# EAGLE board Stepper_driver_daughter_board_+_laser_v5 (EAGLE 9.7.0)
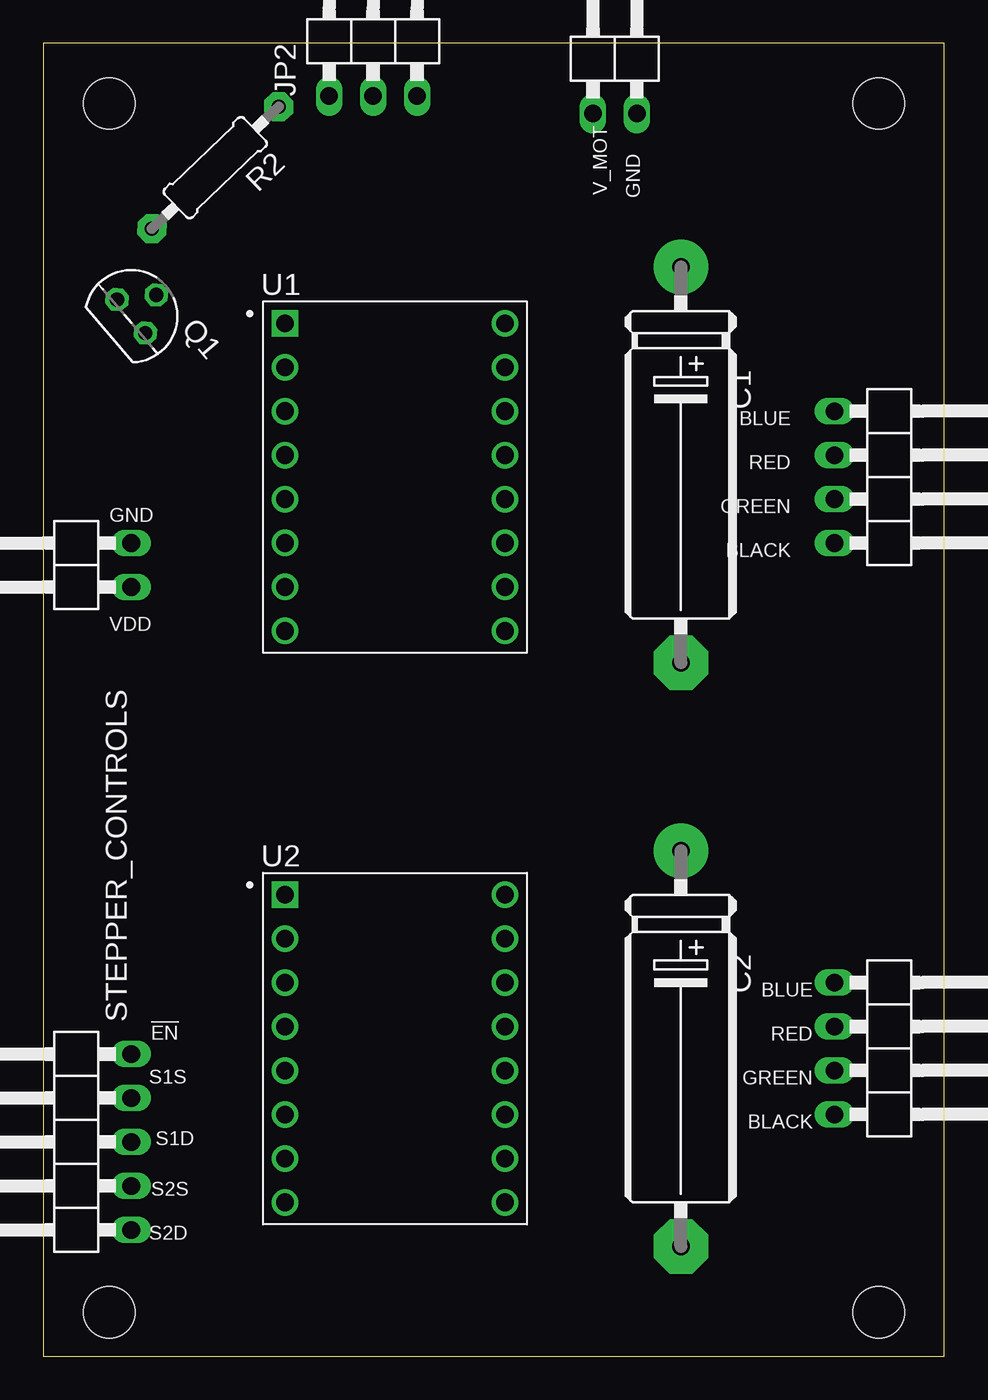
[diagram p0: board, top side]
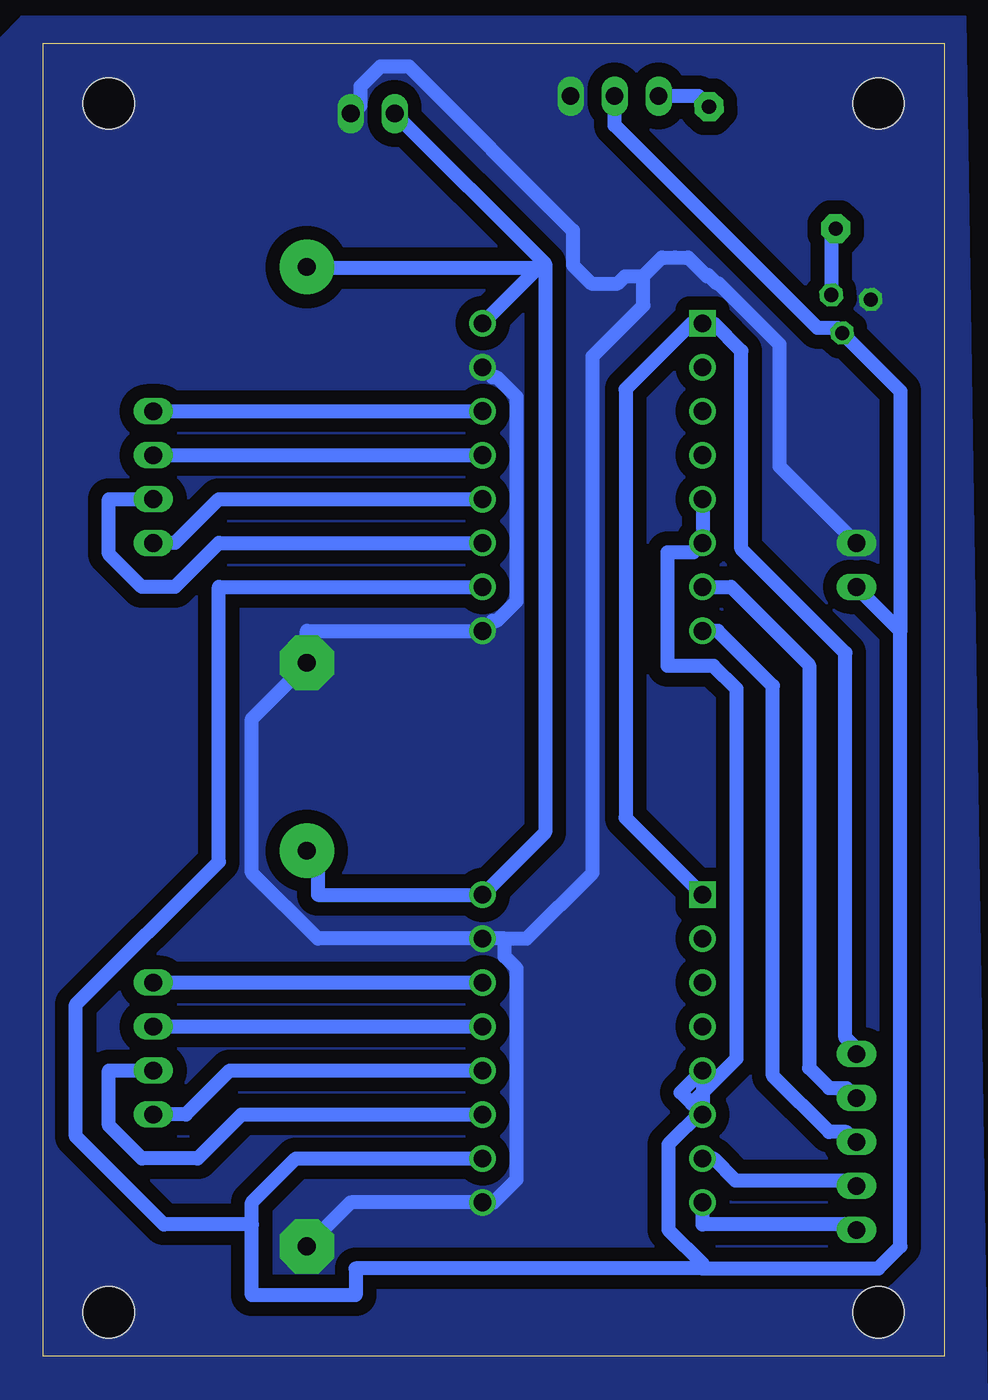
[diagram p1: board, bottom side, seen from below]

Size 52.05 x 75.87 mm. Coordinates in mm from the lower left corner, seen from the top.
Outline: 0,0 52.05,0 52.05,75.87 0,75.87 0,0
Copper layers (1*16): Top 0.035mm / dielectric 1.5mm / Bottom 0.035mm
Design rules "OthermillDRC_1_32_v2 *": minimum track width 32mil, minimum drill 0.8mm, track to track 0.794003125mm, track to pad 0.794003125mm, pad to pad 0.794003125mm, via to via 0.794003125mm, smd to smd 0mil, copper to edge 0mil, drill to drill 1mil, minimum pad ring 10mil, minimum via ring 10mil, stop-mask expansion 1mil, vias tented up to drill 30mil, thermal gap 10mil
Holes 2.95 mm at 3.81,2.54 48.26,2.54 48.26,72.39 3.81,72.39

## Footprints (pad centres in the part's own frame; a part is rotated, then mirrored left to right if it is on the bottom)
E22-6 = drill 1.016 pad 3.15: + -11.43,0 | drill 1.016 pad 3.15 octagon: - 11.43,0
1X03/90 = drill 1.016 long: 1 -2.54,-3.81; 2 0,-3.81; 3 2.54,-3.81
TO92 = drill 0.813 octagon: 1 -1.27,0; 2 0,1.905; 3 1.27,0
0207/10 = drill 0.813 pad 1.676 octagon: 1 -5.08,0; 2 5.08,0
1X04/90 = drill 1.016 long: 1 -3.81,-3.81; 2 -1.27,-3.81; 3 1.27,-3.81; 4 3.81,-3.81
1X05/90 = drill 1.016 long: 1 -5.08,-3.81; 2 -2.54,-3.81; 3 0,-3.81; 4 2.54,-3.81; 5 5.08,-3.81
MODULE_A4988_STEPPER_MOTOR_DRIVER_CARRIER = drill 1.02 square: 1 -6.35,8.89 | drill 1.02: 2 -6.35,6.35; 3 -6.35,3.81; 4 -6.35,1.27; 5 -6.35,-1.27; 6 -6.35,-3.81; 7 -6.35,-6.35; 8 -6.35,-8.89; 9 6.35,-8.89; 10 6.35,-6.35; 11 6.35,-3.81; 12 6.35,-1.27; 13 6.35,1.27; 14 6.35,3.81; 15 6.35,6.35; 16 6.35,8.89
1X02/90 = drill 1.016 long: 1 -1.27,-3.81; 2 1.27,-3.81

## Placement (x,y rotation side)
C1  100u  [E22-6]  36.83,51.51 270 top
C2  100u  [E22-6]  36.83,17.78 270 top
JP2  PINHD-1X3/90  [1X03/90]  19.05,76.63 0 top
Q1  NPN  [TO92]  5.08,60.1 310.3 top
R2  2.4k  [0207/10]  9.94,68.68 223.9 top
STEPPER1_OUT  PINHD-1X4/90  [1X04/90]  49.51,50.8 270 top
STEPPER2_OUT  PINHD-1X4/90  [1X04/90]  49.51,17.78 270 top
STEPPER_CONTROLS  PINHD-1X5/90  [1X05/90]  1.27,12.38 90 top
U1  A4988_STEPPER_MOTOR_DRIVER_CARRIER  [MODULE_A4988_STEPPER_MOTOR_DRIVER_CARRIER]  20.32,50.8 0 top
U2  A4988_STEPPER_MOTOR_DRIVER_CARRIER  [MODULE_A4988_STEPPER_MOTOR_DRIVER_CARRIER]  20.32,17.78 0 top
V_DD  PINHD-1X2/90  [1X02/90]  1.27,45.72 90 top
V_MOT  PINHD-1X2/90  [1X02/90]  33.02,75.62 0 top

## Library data of the parts
C1 C2 R2 = adafruit
JP2 = Connector; CATEGORY: Headers; DESCRIPTION: Header, Right Angle, 3 Position; MANUFACTURER: Generic; MPN: Generic; OPERATING_TEMPERATURE: Generic; PART_STATUS: Active; PITCH: 0.100" (2.54mm); ROHS_COMPLIANCE: Generic; SERIES: Generic; SUB-CATEGORY: Headers, Male Pins; TYPE: Board to Board or Cable, Unshrouded, Through Hole, Right Angle
Q1 = Transistor; CATEGORY: Transistor; SUB-CATEGORY: BJT; TYPE: NPN
STEPPER1_OUT STEPPER2_OUT = Connector; CATEGORY: Headers; DESCRIPTION: Header, Right Angle, 4 Position; MANUFACTURER: Generic; MPN: Generic; OPERATING_TEMPERATURE: Generic; PART_STATUS: Active; PITCH: 0.100" (2.54mm); ROHS_COMPLIANCE: Generic; SERIES: Generic; SUB-CATEGORY: Headers, Male Pins; TYPE: Board to Board or Cable, Unshrouded, Through Hole, Right Angle
STEPPER_CONTROLS = Connector; CATEGORY: Headers; DESCRIPTION: Header, Right Angle, 5 Position; MANUFACTURER: Generic; MPN: Generic; OPERATING_TEMPERATURE: Generic; PART_STATUS: Active; PITCH: 0.100" (2.54mm); ROHS_COMPLIANCE: Generic; SERIES: Generic; SUB-CATEGORY: Headers, Male Pins; TYPE: Board to Board or Cable, Unshrouded, Through Hole, Right Angle
U1 U2 = A4988_STEPPER_MOTOR_DRIVER_CARRIER; AVAILABILITY: Not in stock; CHECK_PRICES: https://www.snapeda.com/parts/A4988%20STEPPER%20MOTOR%20DRIVER%20CARRIER/Pololu/view-part/?ref=eda; DESCRIPTION: Stepper Motor Driver; MF: Pololu; MP: A4988 STEPPER MOTOR DRIVER CARRIER; PACKAGE: None; PRICE: None; SNAPEDA_LINK: https://www.snapeda.com/parts/A4988%20STEPPER%20MOTOR%20DRIVER%20CARRIER/Pololu/view-part/?ref=snap
V_DD V_MOT = Connector; CATEGORY: Headers; DESCRIPTION: Header, Right Angle, 2 Position; MANUFACTURER: Generic; MPN: Generic; OPERATING_TEMPERATURE: Generic; PART_STATUS: Active; PITCH: 0.100" (2.54mm); ROHS_COMPLIANCE: Generic; SERIES: Generic; SUB-CATEGORY: Headers, Male Pins; TYPE: Board to Board or Cable, Unshrouded, Through Hole, Right Angle

## Nets
!ENABLE: STEPPER_CONTROLS.5 U1.1 U2.1
BASE: Q1.2 R2.2
GND: C1.- C2.- JP2.3 Q1.1 U1.9 U1.15 U2.9 U2.15 V_DD.2 V_MOT.2
LASER_SWITCH: JP2.1 R2.1
STEPPER1_BLACK: STEPPER1_OUT.4 U1.12
STEPPER1_BLUE: STEPPER1_OUT.1 U1.14
STEPPER1_DIR: STEPPER_CONTROLS.3 U1.8
STEPPER1_GREEN: STEPPER1_OUT.3 U1.11
STEPPER1_RED: STEPPER1_OUT.2 U1.13
STEPPER1_STEP: STEPPER_CONTROLS.4 U1.7
STEPPER2_BLACK: STEPPER2_OUT.4 U2.12
STEPPER2_BLUE: STEPPER2_OUT.1 U2.14
STEPPER2_DIR: STEPPER_CONTROLS.1 U2.8
STEPPER2_GREEN: STEPPER2_OUT.3 U2.11
STEPPER2_RED: STEPPER2_OUT.2 U2.13
STEPPER2_STEP: STEPPER_CONTROLS.2 U2.7
VDD: JP2.2 Q1.3 U1.5 U1.6 U1.10 U2.5 U2.6 U2.10 V_DD.1
VMOT: C1.+ C2.+ U1.16 U2.16 V_MOT.1

## Tracks (layer width: path | path; a pad name or v marks a point on that pad's centre or on a via)
!ENABLE
  Bottom 0.813: STEPPER_CONTROLS.5 5.08,17.78 5.71,18.41 5.71,40.64 11.73,46.65 11.73,58.08 13.34,59.69 U1.1 14.61,59.69 18.41,55.88 18.41,31.11 U2.1
BASE
  Bottom 0.813: R2.2 6.53,64.9 Q1.2
GND
  Bottom 0.813: V_DD.2 9.53,51.44 9.53,58.47 13.03,61.98 13.15,61.98 13.64,62.48 | C2.- 34.29,8.89 U2.9 26.04,8.89 24.7,10.22 24.7,22.4 25.4,23.1 25.4,24.13 | 25.4,24.13 24.13,24.13 20.32,27.94 20.32,57.78 17.38,60.72 17.38,62.41 | 25.4,24.13 U2.15 36.2,24.13 40.01,27.94 40.01,36.83 36.83,40.01 C1.- 36.83,41.91 U1.9 26.09,42.48 25.86,42.48 24.7,43.64 24.7,55.42 25.86,56.58 26.09,56.58 U1.15 | V_MOT.2 34.29,71.69 33.71,72.27 33.71,73.38 32.56,74.53 30.94,74.53 21.46,65.05 21.46,63.05 20.39,61.98 18.87,61.98 18.44,62.41 17.38,62.41 | 17.38,62.41 16.31,63.48 | 16.31,63.48 14.79,63.48 13.72,62.41 | 17.38,62.41 16.31,63.48 | 16.31,63.48 15.57,63.48
  pour Bottom (no thermals): -1.24,-3.73 53.31,-3.73 54.53,-2.51 54.53,76.17 53.31,77.39 -1.2,77.39 -2.46,-2.51
LASER_SWITCH
  Bottom 0.813: R2.1 14.21,72.82 JP2.1
STEPPER1_BLACK
  Bottom 0.813: STEPPER1_OUT.4 44.45,46.99 41.91,49.53 U1.12
STEPPER1_BLUE
  Bottom 0.813: STEPPER1_OUT.1 U1.14
STEPPER1_DIR
  Bottom 0.813: U1.8 13.08,41.91 9.91,38.73 9.91,16.21 6.66,12.96 5.66,12.96 STEPPER_CONTROLS.3
STEPPER1_GREEN
  Bottom 0.813: STEPPER1_OUT.3 48.26,49.53 48.26,46.35 46.35,44.45 44.45,44.45 41.91,46.99 U1.11
STEPPER1_RED
  Bottom 0.813: STEPPER1_OUT.2 U1.13
STEPPER1_STEP
  Bottom 0.813: STEPPER_CONTROLS.4 5.66,15.5 6.66,15.5 7.8,16.65 7.8,39.94 12.32,44.45 U1.7
STEPPER2_BLACK
  Bottom 0.813: U2.12 41.27,16.51 43.81,13.97 STEPPER2_OUT.4
STEPPER2_BLUE
  Bottom 0.813: STEPPER2_OUT.1 U2.14
STEPPER2_DIR
  Bottom 0.813: U2.8 13.97,7.62 5.08,7.62 STEPPER_CONTROLS.1
STEPPER2_GREEN
  Bottom 0.813: STEPPER2_OUT.3 48.26,16.51 48.26,13.34 46.35,11.43 43.13,11.43 40.59,13.97 U2.11
STEPPER2_RED
  Bottom 0.813: STEPPER2_OUT.2 U2.13
STEPPER2_STEP
  Bottom 0.813: U2.7 13.34,11.43 12.06,10.16 5.08,10.16 STEPPER_CONTROLS.2
VDD
  Bottom 0.813: U1.5 U1.6 14.49,46.47 15.99,46.47 15.99,39.89 13.34,39.89 12.01,38.56 12.01,17.2 14.61,14.61 | 2.54,41.91 V_DD.1 | 2.54,41.91 2.54,6.35 3.81,5.08 13.97,5.08 | 14.61,14.61 15.24,15.24 U2.5 13.97,14.21 15.94,12.24 15.94,7.31 13.97,5.35 13.97,5.08 | 14.61,14.61 U2.6 | U1.10 41.91,44.45 41.91,28.57 50.16,20.32 50.16,12.7 45.09,7.62 40.01,7.62 | 13.97,5.08 34,5.08 34,3.52 40.01,3.52 40.01,7.62 | 40.01,7.62 40.01,8.89 37.47,11.43 U2.10 | JP2.2 19.05,71.13 7.33,59.41 6.18,59.41 Q1.3 2.54,55.77 2.54,41.91
VMOT
  Bottom 0.813: C2.+ 36.2,28.57 36.2,26.67 U2.16 23.07,30.27 23.07,63.12 23.15,63.21 | 23.15,63.21 V_MOT.1 | U1.16 23.5,62.87 | 23.5,62.87 23.15,63.21 | 23.5,62.87 36.83,62.87 C1.+

## Text on the board
tPlace: V_MOT | GND | BLUE | RED | GREEN | GND | BLACK | VDD | BLUE | RED | !EN | GREEN | S1S | BLACK | S1D | S2S | S2D